# EAGLE board lsar (EAGLE 9.5.0)
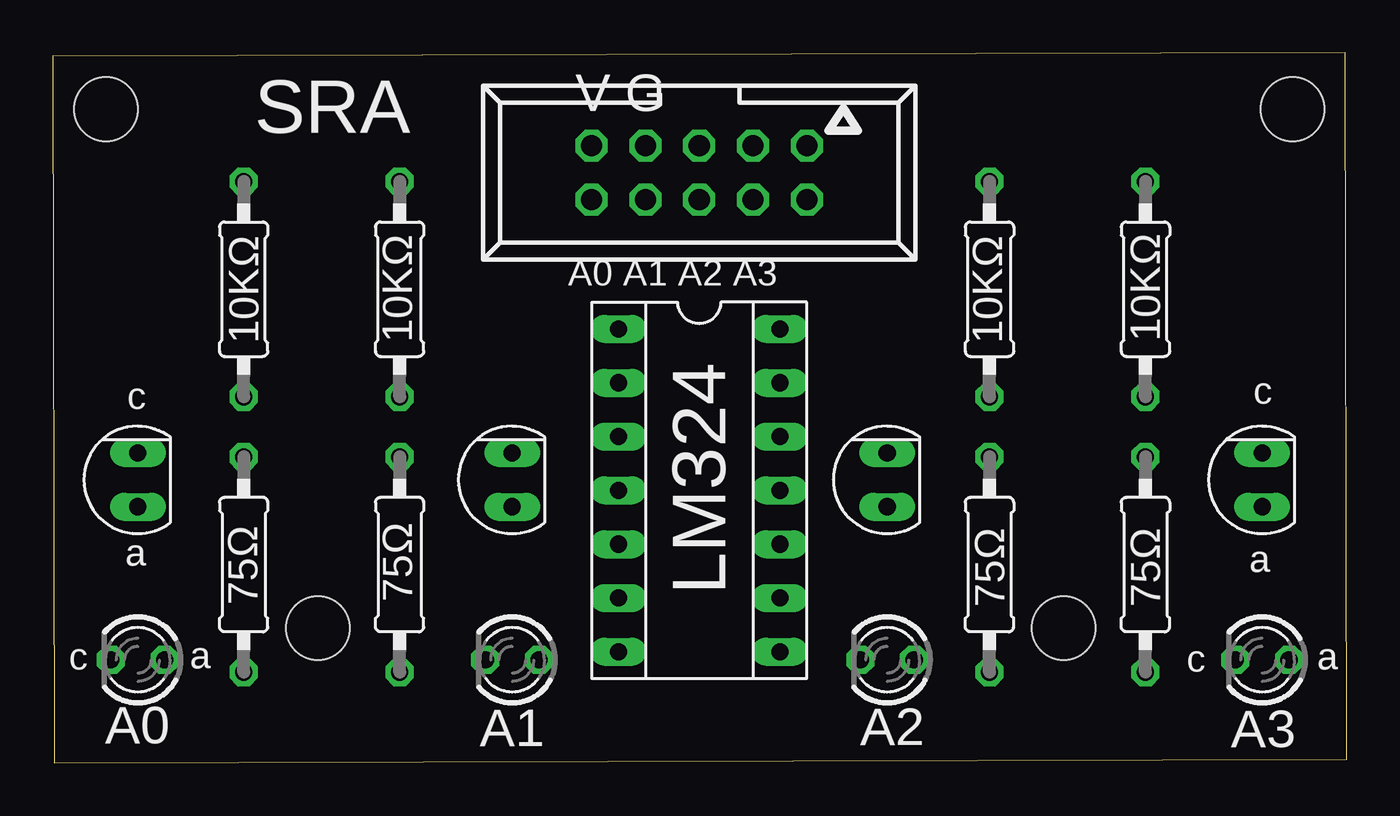
[diagram p0: board, top side]
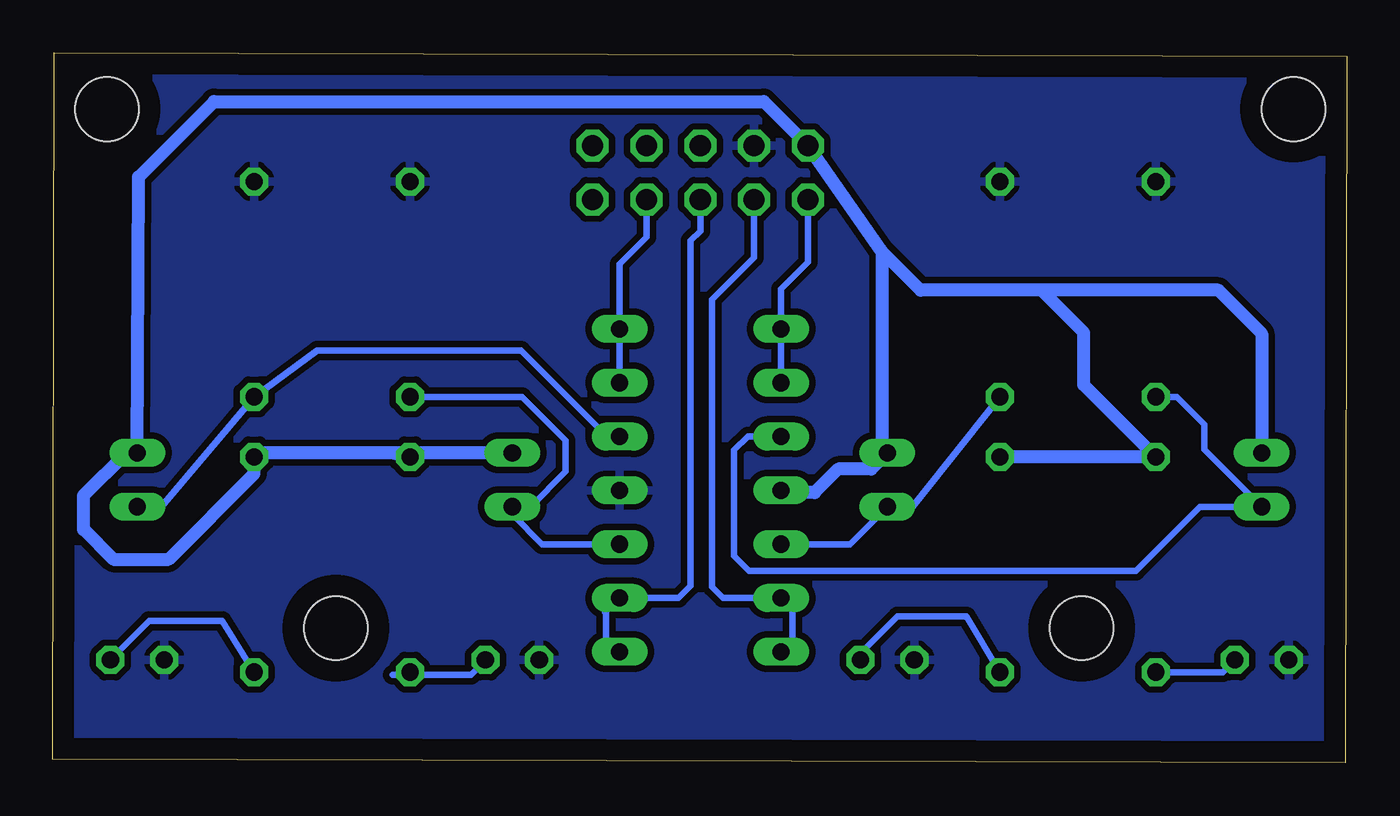
[diagram p1: board, bottom side, seen from below]

Size 61.05 x 33.5 mm. Coordinates in mm from the lower left corner, seen from the top.
Outline: 0.05,0 61.05,0.15 61,33.5 0,33.35 0.05,0
Copper layers (1*16): Top 0.035mm / dielectric 1.5mm / Bottom 0.035mm
Design rules "default *": minimum track width 10mil, minimum drill 24mil, track to track 10mil, track to pad 10mil, pad to pad 10mil, via to via 10mil, smd to smd 8mil, copper to edge 40mil, drill to drill 8mil, minimum pad ring 10mil, minimum via ring 8mil, stop-mask expansion 4mil, vias tented up to drill 0mil, thermal gap 10mil
Holes 3 mm at 58.5,30.85 2.5,30.85 12.5,6.35 47.7,6.35

## Footprints (pad centres in the part's own frame; a part is rotated, then mirrored left to right if it is on the bottom)
LED3MM = drill 0.813 octagon: A -1.27,0; K 1.27,0
SFH206 = drill 0.813 long: A 0,-1.27; K 0,1.27
SOCKET-14 = drill 0.813 long: 1 -7.62,-3.81; 2 -5.08,-3.81; 3 -2.54,-3.81; 4 0,-3.81; 5 2.54,-3.81; 6 5.08,-3.81; 7 7.62,-3.81; 8 7.62,3.81; 9 5.08,3.81; 10 2.54,3.81; 11 0,3.81; 12 -2.54,3.81; 13 -5.08,3.81; 14 -7.62,3.81
0207/10 = drill 0.813 octagon: 1 -5.08,0; 2 5.08,0
057-010-1 = drill 1 octagon: 1 -5.08,-1.27; 2 -5.08,1.27; 3 -2.54,-1.27; 4 -2.54,1.27; 5 0,-1.27; 6 0,1.27; 7 2.54,-1.27; 8 2.54,1.27; 9 5.08,-1.27; 10 5.08,1.27

## Placement (x,y rotation side)
A1  [LED3MM]  4,4.85 180 top
D1  SFH206  [SFH206]  4,13.35 0 top
D2  SFH206  [SFH206]  21.67,13.35 0 top
D3  SFH206  [SFH206]  39.37,13.35 0 top
D4  SFH206  [SFH206]  57.07,13.35 0 top
IC1  [SOCKET-14]  30.5,12.85 270 top
L2  [LED3MM]  21.67,4.85 180 top
L3  [LED3MM]  39.37,4.85 180 top
L4  [LED3MM]  57.07,4.85 180 top
R1  75Ω  [0207/10]  9,22.35 270 top
R2  75Ω  [0207/10]  9,9.35 90 top
R3  75Ω  [0207/10]  16.36,22.35 270 top
R4  75Ω  [0207/10]  16.36,9.35 90 top
R5  75Ω  [0207/10]  44.2,22.35 270 top
R6  75Ω  [0207/10]  44.2,9.35 90 top
R7  75Ω  [0207/10]  51.56,22.35 270 top
R8  75Ω  [0207/10]  51.56,9.35 90 top
X1  057-010-1  [057-010-1]  30.5,27.85 180 top

## Library data of the parts
A1 L2-L4 = led
D1-D4 = opto-trans-siemens; MPN: SFH206K; OC_FARNELL: 1212741; OC_NEWARK: 01M8807
IC1 = ic-package
R1-R8 = resistor
X1 = con-panduit; OC_FARNELL: unknown; OC_NEWARK: unknown

## Nets
A0: IC1.1 IC1.2 X1.10
A1: IC1.6 IC1.7 X1.8
A2: IC1.8 IC1.9 X1.6
A3: IC1.13 IC1.14 X1.4
GND: A1.K IC1.11 L2.K L3.K L4.K R1.1 R3.1 R5.1 R7.1 X1.7
N$1: A1.A R2.1
N$2: D1.A IC1.3 R1.2
N$3: L2.A R4.1
N$4: D2.A IC1.5 R3.2
N$5: L4.A R8.1
N$6: D4.A IC1.12 R7.2
N$8: L3.A R6.1
NS7: D3.A IC1.10 R5.2
VCC: D1.K D2.K D3.K D4.K IC1.4 R2.2 R4.2 R6.2 R8.2 X1.9

## Tracks (layer width: path | path; a pad name or v marks a point on that pad's centre or on a via)
A0
  Bottom 0.305: IC1.2 IC1.1 26.69,22.36 25.42,23.63 X1.10
A1
  Bottom 0.305: X1.8 27.96,23.84 29.95,21.85 29.95,8.3 29.42,7.77 IC1.6 26.15,7.23 26.15,5.77 IC1.7
A2
  Bottom 0.305: IC1.8 34.38,5.23 34.95,5.8 34.95,7.05 35,7.1 34.33,7.77 IC1.9 31.53,7.77 30.95,8.35 30.95,24.63 30.5,25.08 X1.6
A3
  Bottom 0.305: IC1.13 IC1.14 34.31,23.54 33.04,24.81 X1.4
GND
  pour Bottom (isolate 0.305): 0.05,0 0.05,33.35 61,33.35 61,0
N$1
  Bottom 0.305: A1.A 5.85,4.27 R2.1
N$2
  Bottom 0.305: R1.2 8.02,17.27 6.7,15.95 6.7,14.78 D1.A 6.92,12.08 9.95,9.05 28.2,9.05 28.9,9.75 28.9,14.75 28.26,15.39 IC1.3
N$3
  Bottom 0.305: R4.1 17.93,6.9 21.2,6.9 22.94,5.16 L2.A
N$4
  Bottom 0.305: R3.2 20.49,12.08 D2.A 23.44,10.31 IC1.5
N$5
  Bottom 0.305: R8.1 53.07,6.7 56.5,6.7 58.28,4.92 L4.A
N$6
  Bottom 0.305: IC1.12 34.89,15.39 38.95,19.45 48.58,19.45 R7.2 55.95,12.08 D4.A
N$8
  Bottom 0.305: L3.A 41.31,4.15 45.02,4.15 R6.1
NS7
  Bottom 0.305: R5.2 38.92,17.27 36.85,15.2 36.85,13.75 38.52,12.08 D3.A 39.37,11.72 37.96,10.31 IC1.10
VCC
  Bottom 0.61: IC1.4 26.59,12.75 25.1,12.75 24,13.85 22.44,13.85 D2.K 21.92,14.87 21.92,24.12 | D1.K 4,20.25 6.05,22.3 14.4,22.3 | 21.92,24.12 20.1,22.3 14.4,22.3 | D3.K 44.95,14.62 | 44.95,14.62 R6.2 | 21.92,24.12 X1.9 27.5,31.2 53.45,31.2 57.01,27.64 D4.K 57.58,14.62 59.6,12.6 59.6,11 58.2,9.6 55.6,9.6 51.56,13.64 R8.2 51.37,14.62 44.95,14.62 | R4.2 R2.2 12.4,17.83 12.4,20.3 14.4,22.3

## Text on the board
tNames: V G | SRA | A0 A1 A2 A3 | 10KΩ | 10KΩ | 10KΩ | 10KΩ | c | c | a | a | 75Ω | 75Ω | LM324 | 75Ω | 75Ω | c | a | c | a | A1 | A2 | A3 | A0